# EAGLE board txs0108e (EAGLE 6.4)
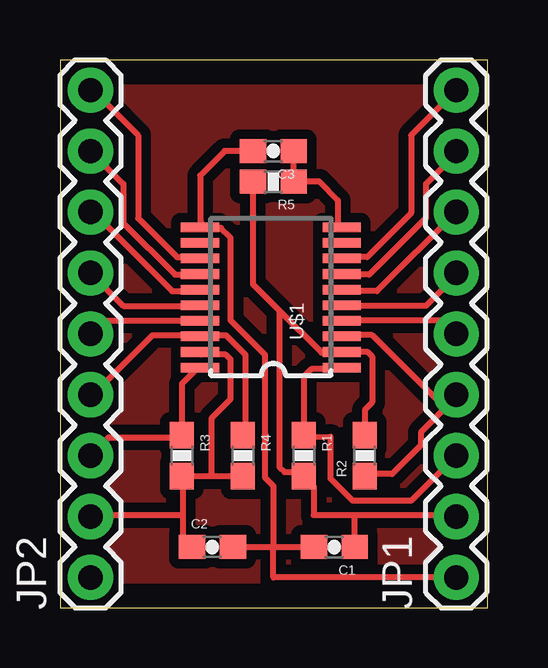
[diagram p0: board, top side]

Size 17.83 x 22.85 mm. Coordinates in mm from the lower left corner, seen from the top.
Outline: 0,0 17.83,0 17.83,22.85 0,22.85 0,0
Copper layers (1*16): Top 0.035mm / dielectric 1.5mm / Bottom 0.035mm
Design rules "default": minimum track width 10mil, minimum drill 0.6mm, track to track 8mil, track to pad 8mil, pad to pad 8mil, via to via 8mil, smd to smd 8mil, copper to edge 40mil, drill to drill 8mil, minimum pad ring 10mil, minimum via ring 8mil, stop-mask expansion 4mil, vias tented up to drill 0mil, thermal gap 10mil

## Footprints (pad centres in the part's own frame; a part is rotated, then mirrored left to right if it is on the bottom)
0603-CAP = smd 1.1 x 1: 1 -0.85,0; 2 0.85,0
1X09 = drill 1.016 pad 1.88: 1 0,0; 2 2.54,0; 3 5.08,0; 4 7.62,0; 5 10.16,0; 6 12.7,0; 7 15.24,0; 8 17.78,0; 9 20.32,0
0603-RES = smd 1.1 x 1: 1 -0.85,0; 2 0.85,0
TSSOP20 = smd 0.4 x 1.6: 1 -2.675,-2.85; 2 -2.025,-2.85; 3 -1.375,-2.85; 4 -0.725,-2.85; 5 -0.075,-2.85; 6 0.575,-2.85; 7 1.225,-2.85; 8 1.875,-2.85; 9 2.525,-2.85; 10 3.175,-2.85; 11 3.175,3.05; 12 2.525,3.05; 13 1.875,3.05; 14 1.225,3.05; 15 0.575,3.05; 16 -0.075,3.05; 17 -0.725,3.05; 18 -1.375,3.05; 19 -2.025,3.05; 20 -2.675,3.05

## Placement (x,y rotation side)
C1  1uF  [0603-CAP]  11.43,2.54 180 top
C2  1uF  [0603-CAP]  6.35,2.54 0 top
C3  1uF  [0603-CAP]  8.89,19.05 180 top
JP1  M09  [1X09]  16.51,1.27 90 top
JP2  M09  [1X09]  1.27,1.27 90 top
R1  4k7  [0603-RES]  10.16,6.35 270 top
R2  4k7  [0603-RES]  12.7,6.35 90 top
R3  4k7  [0603-RES]  5.08,6.35 270 top
R4  4k7  [0603-RES]  7.62,6.35 270 top
R5  10k  [0603-RES]  8.89,17.78 180 top
U$1  TXS0108E  [TSSOP20]  8.89,12.7 90 top

## Library data of the parts
C1-C3 R1-R5 = SparkFun-Passives
JP1 JP2 = SparkFun-Connectors
U$1 = Synapseware

## Nets
3.3V: C1.1 JP1.2 R1.2 R2.2 R5.2 U$1.2
5V: C2.1 JP2.2 R3.2 R4.2 U$1.19
A1: JP1.3 R1.1 U$1.1
A2: JP1.4 R2.1 U$1.3
A3: JP1.5 U$1.4
A4: JP1.6 U$1.5
A5: JP1.7 U$1.6
A6: JP1.8 U$1.7
A7: JP1.9 U$1.8
A8: U$1.9
B1: JP2.3 R3.1 U$1.20
B2: JP2.4 R4.1 U$1.18
B3: JP2.5 U$1.17
B4: JP2.6 U$1.16
B5: JP2.7 U$1.15
B6: JP2.8 U$1.14
B7: JP2.9 U$1.13
B8: U$1.12
GND: C1.2 C2.2 C3.2 JP1.1 U$1.11
N$2: JP2.1
OE: C3.1 R5.1 U$1.10

## Tracks (layer width: path | path; a pad name or v marks a point on that pad's centre or on a via)
3.3V
  Top 0.254: 12.32,3.86 16.46,3.86 JP1.2 | 12.32,3.86 10.57,3.86 10.57,5.08 10.16,5.49 R1.2 10.16,5.69 9.8,5.66 9.35,5.66 9.14,5.87 9.14,12.39 | 9.14,12.39 10.9,10.64 11.71,10.64 U$1.2 11.79,10.69 12.8,10.69 13.01,10.49 13.01,8.56 12.7,8.26 R2.2 | R5.2 8.04,13.5 9.14,12.39 | C1.1 12.28,3.82 12.32,3.86
5V
  Top 0.254: 6.33,5.49 7.52,5.49 R4.2 | 6.33,5.49 5.11,5.49 | 5.11,5.49 5.08,5.49 R3.2 5.11,5.49 | 5.11,5.49 5.11,3.86 | 5.11,3.86 5.11,2.52 C2.1 | 6.33,5.49 6.33,7.92 7.11,8.71 7.11,10.36 6.91,10.57 5.89,10.57 U$1.19 | 5.11,3.86 1.42,3.86 JP2.2
A1
  Top 0.254: U$1.1 11.58,9.96 10.46,9.96 10.16,9.65 R1.1 10.16,7.11 11.28,7.14 11.28,5.38 12.19,4.47 14.63,4.47 JP1.3
A2
  Top 0.254: 16.05,8.33 16.46,8.74 JP1.4 16.05,8.33 | 16.05,8.33 15.04,7.32 15.04,6.78 13.84,5.59 12.79,5.59 R2.1 | 16.05,8.33 13.01,11.38 11.79,11.38 U$1.3
A3
  Top 0.254: U$1.4 11.79,11.99 16.05,11.99 16.46,11.58 JP1.5
A4
  Top 0.254: U$1.5 11.79,12.6 15.24,12.6 16.46,13.82 JP1.6
A5
  Top 0.254: JP1.7 13.21,13.21 11.79,13.21 U$1.6
A6
  Top 0.254: U$1.7 11.66,13.89 12.88,13.89 15.24,16.26 15.24,17.68 16.46,18.9 JP1.8
A7
  Top 0.254: JP1.9 14.63,19.71 14.63,16.46 12.8,14.63 11.79,14.63 U$1.8
B1
  Top 0.254: U$1.20 5.69,9.96 5.08,9.35 R3.1 5.08,7.11 2.03,7.11 JP2.3
B2
  Top 0.254: R4.1 7.72,7.32 7.72,10.57 6.91,11.38 5.89,11.38 U$1.18 5.69,11.38 3.86,11.38 1.42,8.94 JP2.4
B3
  Top 0.254: JP2.5 1.83,11.99 5.69,11.99 U$1.17
B4
  Top 0.254: JP2.6 2.64,12.6 5.69,12.6 U$1.16
B5
  Top 0.254: U$1.15 5.69,13.21 4.67,13.21 1.42,16.46 JP2.7
B6
  Top 0.254: JP2.8 2.64,17.68 2.64,16.05 4.8,13.89 5.82,13.89 U$1.14
B7
  Top 0.254: U$1.13 5.69,14.63 4.88,14.63 3.25,16.26 3.25,19.71 1.42,21.54 JP2.9
GND
  Top 0.254: 5.89,16.05 U$1.11 | C2.2 7.32,2.44 7.52,2.44 7.62,2.54 8.89,2.54 | U$1.11 5.89,15.85 6.71,15.85 7.11,15.44 7.11,11.99 8.53,10.57 8.53,5.44 8.89,5.08 8.89,2.54 | C3.2 6.86,19.05 5.84,18.03 U$1.11 | JP1.1 8.89,1.27 8.89,2.54 | 8.89,2.54 C1.2
N$1
  pour Top (isolate 0.406): 0,0 17.78,0 17.78,22.86 0,22.86
OE
  Top 0.254: U$1.10 11.58,16.05 11.58,16.99 10.79,17.78 R5.1 C3.1